# Allegro board ADUINO_UNO.brd
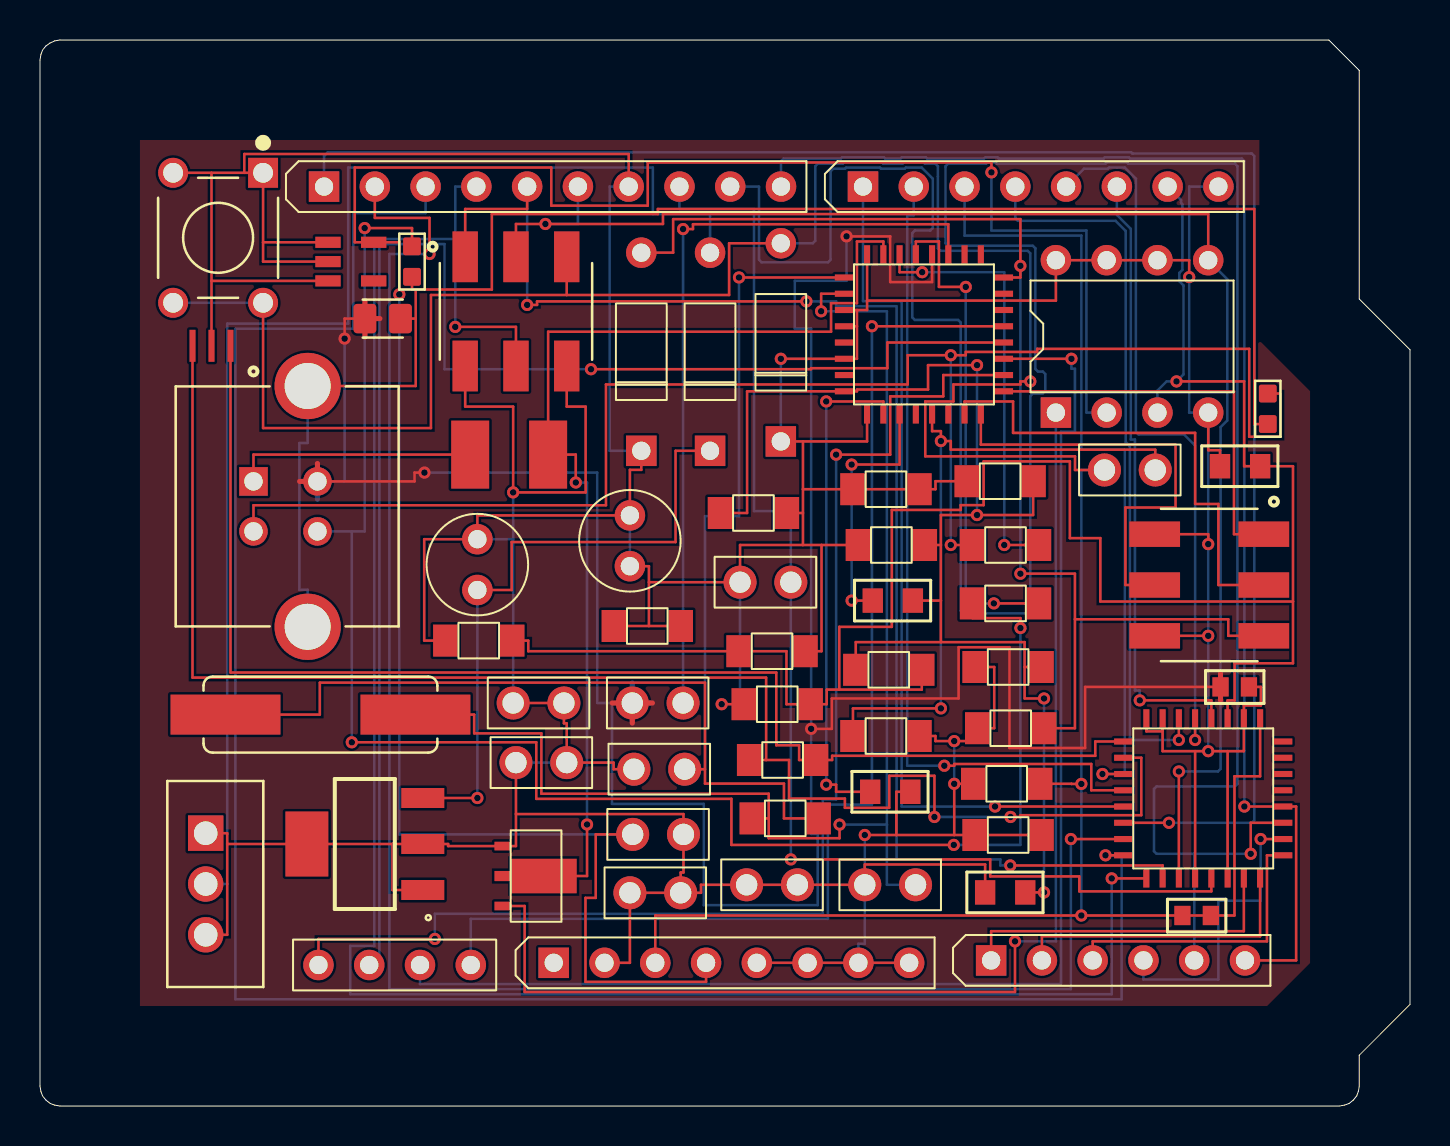
[diagram p0: board, top side]
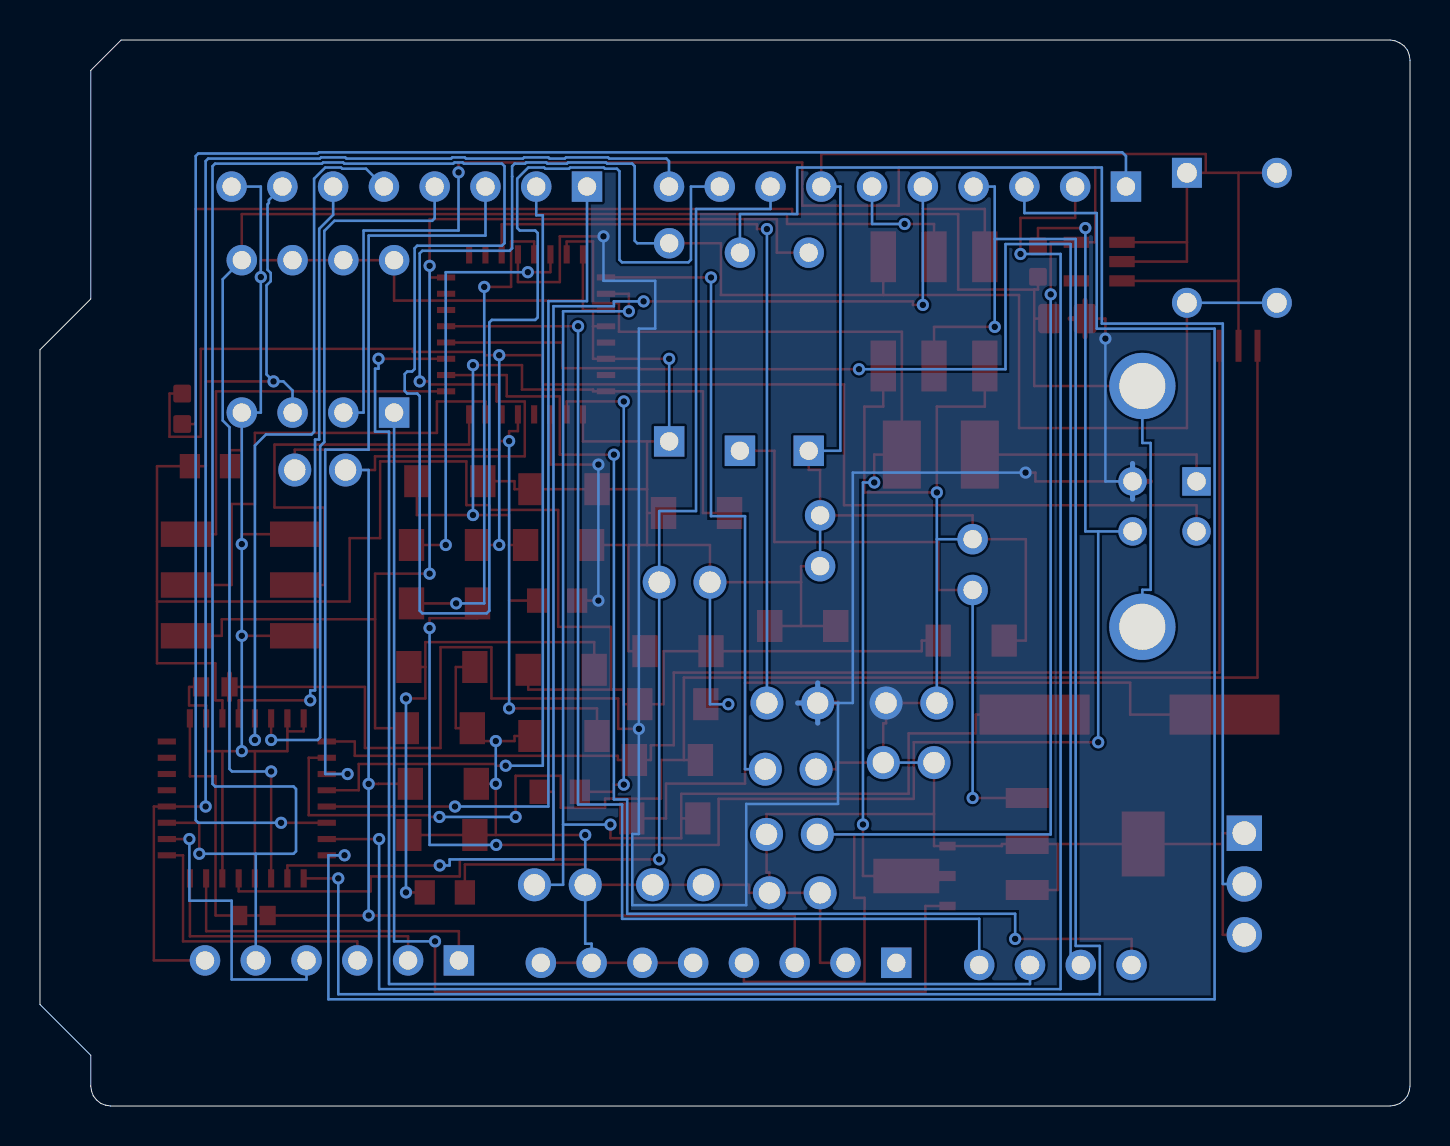
[diagram p1: board, bottom side, seen from below]

Outline 68.53 x 53.3 mm; copper layers: TOP, BOTTOM. Coordinates in mm from the lower left corner of the outline.
Outline path: 0,52.28 0,0.99 0.04,0.74 0.13,0.51 0.3,0.3 0.51,0.13 0.74,0.04 0.99,0 65,0 65.25,0.04 65.49,0.13 65.7,0.3 65.87,0.51 65.95,0.74 66,0.99 66,2.54 68.53,5.08 68.53,37.81 66,40.35 66,51.78 64.47,53.3 0.99,53.3 0.74,53.26 0.51,53.15 0.3,53 0.13,52.79 0.04,52.56 0,52.28

## Design rules (mm)
constraint set DEFAULT: min track width 0.127

## Placement (name value [footprint] x y rotation side)
C1  100n  [CAPCK05]  23.81 17.17 270 top
C2  100n  [CAPCK05]  23.67 20.15 270 top
C3  1u  [CAPCK05]  29.65 13.58 270 top
C4  100n  [CAPCK05]  35.02 26.19 270 top
C5  100n  [CAPCK05]  55.79 31.8 90 top
C6  100n  [CAPCK05]  35.35 11.06 270 top
C7  100n  [CAPCK05]  29.51 10.66 270 top
C8  1u  [CAPCK05]  32.17 20.15 90 top
C9  22p  [CAPCK05]  29.71 16.84 270 top
C11  22p  [CAPCK05]  41.26 11.06 270 top
CD120  DIODE  [DO41]  37.06 33.23 0 top
D1  M7  [DO41]  33.52 32.76 0 top
D3  CD1206-S01575  [DO41]  30.08 32.76 0 top
F1  MF-MSMF050-2 50mA  [FUSM1812X02]  23.47 32.57 0 top
GROUND  SW PUSHBUTTON  [SMC0603]  59.05 20.95 0 top
IC1  ATmega16U2-PU  [MY_ATMEGA328]  58.19 15.38 270 top
IC2  ATmega8 - TQFP32  [MY_ATMEGA328]  44.22 38.58 0 top
ICSP1  3X2 M  [MY_6PINHEADER]  58.49 26.05 270 top
J1  8*1F-88.5  [SIP8]  25.7 7.16 90 top
J4  3*2 M  [MY_6PINHEADER]  23.81 39.73 0 top
J5  10*1F-H8.5  [SIP10]  14.21 45.97 90 top
J7  6X1F-H8.5  [SIP6]  47.58 7.28 90 top
J8  8X1F-H8.5  [SIP8]  41.17 45.97 90 top
JP2  2*2 M- NM  [JUMPER4]  13.93 7.05 0 top
L  YELLOW  [SML0805]  59.03 31.99 0 top
L1  BLM21  [BEADC2012X87N]  17.14 39.37 0 top
ON  GREEN  [SML0805]  47.28 10.68 0 top
PC1  47u  [CAP196]  21.88 25.8 0 top
PC2  47u  [CAP196]  29.51 26.99 0 top
R1  1M  [SMDRES]  37.28 14.38 0 top
R2  1M  [SMDRES]  37.15 17.3 0 top
RESET-FM  SW PUSHBUTTON  [SMC0603]  57.15 9.53 0 top
RN1A  10k  [SMDRES]  36.88 20.09 0 top
RN1B  10k  [SMDRES]  36.62 22.74 0 top
RN1C  10k  [SMDRES]  48.56 18.89 0 top
RN1D  10k  [SMDRES]  48.36 16.11 0 top
RN2A  1k  [SMDRES]  21.95 23.27 0 top
RN2B  1k  [SMDRES]  30.38 24 0 top
RN2C  1k  [SMDRES]  35.69 29.65 0 top
RN2D  1k  [SMDRES]  42.32 18.5 0 top
RN3A  22  [SMDRES]  48.3 28.05 0 top
RN3B  RN3C  [SMDRES]  48.43 21.95 0 top
RN3D  22  [SMDRES]  48.3 25.13 0 top
RN4A  1k  [SMDRES]  42.46 21.81 0 top
RN4B  1k  [SMDRES]  42.32 30.84 0 top
RN4C  1k  [SMDRES]  42.59 28.05 0 top
RN4D  1k  [SMDRES]  48.03 31.24 0 top
RX  YELLOW  [SML0805]  41.53 15.71 0 top
SW1  SW PUSHBUTTON-SPST-2  [SW4PIN]  8.91 43.41 270 top
T1  FDN340P  [SOT89]  23.14 10 0 top
TX  YELLOW  [SML0805]  41.66 25.27 0 top
U1  NCP1117ST50T3G  [MY_NCP]  17.25 13.1 180 top
U2  LP2985-33DRVR  [MY_2985]  15.55 42.22 0 top
U7  LM358  [DIP8_3]  50.82 34.67 90 top
UNK22R  22R  [SMDRES]  48.43 13.55 0 top
X1  POWERSUPPLY_Y_DC21MMX  [MY_POWER2]  8.29 13.64 270 top
X2  USB-B_TH  [USB_B]  10.68 31.23 90 top
Y1  16MHz  [MY_XTAL]  14.03 19.57 0 top
Y2  CSTCE16M0V53-R0  [MY_XTALC]  8.58 38.01 0 top
Z1  CG0603MLC-05E  [R0603]  18.61 42.22 0 top
Z2  CG0603MLC-05E  [R0603]  61.42 34.86 0 top

## Library data of the parts
C1-C9 C11 = CAP NP: Tolerance: ***; User Part Number: ***
CD120 = DIODE_0
D1 D3 = DIODE
F1 = FUSE
GROUND RESET-FM = SW PUSHBUTTON
IC1 = ATMega8-TQFP32_1
IC2 = ATMega8-TQFP32_0
ICSP1 J4 = CON6A
J1 J8 = CON8: User Part Number: ***
J5 = CON10: User Part Number: ***
J7 = CON6_1: User Part Number: ***
JP2 = CON4A: User Part Number: ***
L ON RX TX = LED
L1 = BEAD
PC1 PC2 = CAP POL: Tolerance: ***; User Part Number: ***
R1 R2 RN1A RN1B RN1C RN1D RN2A RN2B RN2C RN2D RN3A RN3B RN3D RN4A RN4B RN4C RN4D UNK22R = R2: Tolerance: ***; User Part Number: ***
SW1 = SW PUSHBUTTON-SPST-2
T1 = EMOS-PD
U1 = BA17805FP/TO_3
U2 = LP2957/TO_0
U7 = LM358: Tolerance: ***; User Part Number: ***
X1 = BA17805FP/TO_8
X2 = CON6_5
Y1 = ZTA
Y2 = CSTCE8M00G52-R0
Z1 Z2 = VARISTOR

## Footprints (pads in the part's own frame, mm; a bottom-side part is the same pattern mirrored in y, then rotated)
BEADC2012X87N
  custom 1.14x1.47 smd: 1(-0.89,0) 2(0.89,0)
CAP196
  round 1.524 hole 0.914: 1(0,0) 2(0,2.54)
CAPCK05
  round 1.651 hole 1.067: 1(0,0) 2(0,2.54)
DIP8_3
  rect 1.524x1.524 hole 0.914: 1(0,0)
  round 1.524 hole 0.914: 2(0,-2.54) 3(0,-5.08) 4(0,-7.62) 5(7.62,-7.62) 6(7.62,-5.08) 7(7.62,-2.54) 8(7.62,0)
DO41
  rect 1.524x1.524 hole 0.914: 1(0,0)
  round 1.524 hole 0.914: 2(0,9.906)
FUSM1812X02
  rect 1.9x3.4 smd: 1(-1.95,0) 2(1.95,0)
JUMPER4
  round 1.524 hole 0.914: 1(0,0) 2(2.54,0) 3(5.08,0) 4(7.62,0)
MY_6PINHEADER
  rect 1.27x2.54 smd: 1(-2.54,2.73) 2(-2.54,-2.73) 3(0,2.73) 4(0,-2.73) 5(2.54,2.73) 6(2.54,-2.73)
MY_2985
  rect 1.27x0.559 smd: 1(-1.143,0.965) 2(-1.143,0) 3(-1.143,-0.965) 4(1.143,-0.965) 5(1.143,0.965)
MY_ATMEGA328
  rect 0.914x0.305 smd: 1(-4,2.846) 2(-4,2.032) 3(-4,1.219) 4(-4,0.406) 5(-4,-0.407) 6(-4,-1.22) 7(-4,-2.032) 8(-4,-2.845) 17(4,-2.846) 18(4,-2.032) 19(4,-1.219) 20(4,-0.406) 21(4,0.407) 22(4,1.22) 23(4,2.032) 24(4,2.845)
  rect 0.305x0.914 smd: 9(-2.846,-4) 10(-2.032,-4) 11(-1.219,-4) 12(-0.406,-4) 13(0.407,-4) 14(1.22,-4) 15(2.032,-4) 16(2.845,-4) 25(2.846,4) 26(2.032,4) 27(1.219,4) 28(0.406,4) 29(-0.407,4) 30(-1.22,4) 31(-2.032,4) 32(-2.845,4)
MY_NCP
  rect 2.15x1 smd: 1(-1.9,2.3) 2(-1.9,0) 3(-1.9,-2.3)
  rect 2.15x3.25 smd: 4(3.9,0)
MY_POWER2
  rect 1.77x1.77 hole 1.18: 1(0,0)
  round 1.77 hole 1.18: 2(2.54,0) 3(5.08,0)
MY_XTAL
  rect 5.5x2 smd: 1(-4.75,0) 2(4.75,0)
MY_XTALC
  rect 0.3x1.6 smd: 1(-0.95,0) 2(0,0) 3(0.95,0)
R0603
  custom 0.889x0.889 smd: 1(0,0.762) 2(0,-0.762)
SIP6
  rect 1.524x1.524 hole 0.914: 1(0,0)
  round 1.524 hole 0.914: 2(0,-2.54) 3(0,-5.08) 4(0,-7.62) 5(0,-10.16) 6(0,-12.7)
SIP8
  rect 1.524x1.524 hole 0.914: 1(0,0)
  round 1.524 hole 0.914: 2(0,-2.54) 3(0,-5.08) 4(0,-7.62) 5(0,-10.16) 6(0,-12.7) 7(0,-15.24) 8(0,-17.78)
SIP10
  rect 1.524x1.524 hole 0.914: 1(0,0)
  round 1.524 hole 0.914: 2(0,-2.54) 3(0,-5.08) 4(0,-7.62) 5(0,-10.16) 6(0,-12.7) 7(0,-15.24) 8(0,-17.78) 9(0,-20.32) 10(0,-22.86)
SMC0603
  rect 0.813x0.965 smd: 1(0,0) 2(1.422,0)
SMDRES
  rect 1.27x1.6 smd: 1(-1.651,0) 2(1.651,0)
SML0805
  rect 1.016x1.219 smd: 1(0,0) 2(2.007,0)
SOT89
  rect 0.813x0.432 smd: 1(0,0) 2(0,2.997)
  custom 4.115x1.727 smd: 3(1.651,1.499)
SW4PIN
  rect 1.498x1.498 hole 0.99: 1(-3.25,2.25)
  round 1.498 hole 0.99: 2(-3.25,-2.25) 3(3.25,2.25) 4(3.25,-2.25)
USB_B
  rect 1.428x1.428 hole 0.92: 1(0,0)
  round 1.428 hole 0.92: 2(-2.5,0) 3(-2.5,-3.2) 4(0,-3.2)
  round 3.316 hole 2.3: SH1(-7.27,-2.71) SH2(4.77,-2.71)

## Nets
+3V3: C3.1 J1.4 U2.5(OUT) U7.2
+5V: C1.1 C1.2 C2.1 C2.2 C3.2 C4.1 C6.1 C6.2 C7.1 C7.2 C9.1 C11.1 CD120.1(K) D3.1(K) GROUND.2 IC1.2 IC1.7 IC1.8 IC1.20 IC1.22 IC2.3 IC2.4 IC2.6 IC2.9 IC2.32 ICSP1.2 ICSP1.6 J1.2 J1.5 J1.6 J1.7 J1.8 J4.2 J4.6 J5.7 J8.8 L.1(CATHODE) ON.1(CATHODE) PC1.2 PC2.1 PC2.2 RN1A.1 RN1B.2 RN1C.1 RN1D.1 RN2A.1 RN2B.1 RN2B.2 RN2C.2 RN2D.2 RN3B.1 RN4B.1 RN4B.2 RN4C.1 RN4D.1 RX.2 SW1.1 SW1.2 T1.2(S) U1.1 U1.2 U1.4(OUT) U2.1 U2.2 U2.3 U7.4 U7.6 U7.7(OUT) U7.8 UNK22R.1 UNK22R.2 X1.1 X1.3 Y2.2
1: IC1.3 J8.7 L.2 RN1A.2 RN1B.1 RN2A.2 RN4A.2 U7.3
5: IC2.8 ON.2 RN2C.1 RN3B.2 RN4A.1 RN4C.2 RN4D.2 TX.2
AD0: IC1.23 J7.1
AD1: IC1.24 J7.2
AD2: IC1.25 J7.3
AD3: IC1.26 J7.4
AD4/SDA: IC1.27 J5.9 J7.5(P$1)
AD5/SCI: IC1.28 J5.10 J7.6
AREF: C4.2 IC1.21 J5.8
DTR: C5.1 IC2.13 RN2D.1
IO2: IC1.4 J8.6
IO3: IC1.5 J8.5
IO4: IC1.6 J8.4
IO5: IC1.11 J8.3
IO6: IC1.12 J8.2
IO7: IC1.13 J8.1
IO8: IC1.14 J5.1
IO9: IC1.15 J5.2
MISO: IC1.18 J4.1 J5.5
MISO2: IC2.17 ICSP1.1
MOSI: IC1.17 J4.4 J5.4
MOSI2: IC2.16 ICSP1.4
PB4: IC2.18 JP2.1
PB5: IC2.19 JP2.3
PB6: IC2.20 JP2.2
PB7: IC2.21 JP2.4
PWRIN: D1.2 X1.2
RD+: IC2.29 RN3D.2
RD-: IC2.30 RN3A.2
RESET: C5.2 CD120.2 IC1.1 J1.3 J4.5 RESET-FM.1 RESET-FM.2 RN1D.2 SW1.3 SW1.4
RESET2: D3.2 IC2.24 ICSP1.5 RN1C.2
RXLED: IC2.10 RX.1(CATHODE)
SCK: IC1.19 J4.3 J5.6 U7.5
SCK2: IC2.15 ICSP1.3
SS: IC1.16 J5.3
TP_VUCAP: C8.1 IC2.27
TXLED: IC2.11 TX.1(CATHODE)
UGND: C8.2 GROUND.1 IC2.28 L1.1 X2.4
USBVCC: F1.2 IC2.31 T1.3
USHIELD: L1.2 X2.SH1 X2.SH2(6) Z1.2 Z2.2
XT1: C9.2 IC2.1 R1.2 Y1.1
XT2: C11.2 IC2.2(XTAL2(PC0)) R1.1 Y1.2
XUSB: F1.1 X2.1
N01472: T1.1 U7.1
N03886: RN3A.1 X2.2 Z2.1
N03915: RN3D.1 X2.3 Z1.1
N09861: IC1.10(XTAL2) R2.1 Y2.1
N20628: D1.1(K) PC1.1 U1.3
N61244: IC1.9 R2.2 Y2.3

Pads without a net: IC1 29 30 31 32; IC2 5 7 12 14 22 23 25 26; J1 1; U2 4

## Via types
v1: diameter 0.61, hole 0.33, TOP to BOTTOM, 78 vias

## Routing (per net, layer and track width the routed paths; a pad name or vN(x,y) marks a point on that pad's centre or on a via; arc(x,y) is an arc through that point)
+3V3: length 118.2
  TOP w0.127: C3.1 27.8,13.58 27.8,10.41 27.29,10.41 27.29,6.21 33.32,6.21 J1.4 ; v1(47.6,46.68) 47.6,47.18 30.4,47.18 30.4,45.02 25.58,45.02 25.58,46.92 15.75,46.92 15.75,43.19 U2.5 17.98,43.19 v1(17.98,40.58)
  BOTTOM w0.127: v1(17.98,40.58) 17.98,13.58 C3.1 ; v1(47.6,46.68) 47.6,43.77 52.35,43.77 52.35,34.67 U7.2
+5V: length 395.6
  TOP w0.127: 45.73,13.55 v1(45.73,16.11) RN1D.1 ; 45.73,13.55 42.84,13.55 ; 45.73,13.55 UNK22R.1 UNK22R.2 ; RN2D.2 44.8,18.5 44.8,18.25 v1(45.73,18.25) 46.91,18.25 RN1C.1 47.73,18.89 47.73,21.95 RN3B.1 ; 11.16,43.19 SW1.1 10.22,46.66 ; 11.16,43.19 11.16,42.22 U2.2 ; 11.16,43.19 U2.1 ; RN2A.1 19.22,23.27 19.22,28.34 PC1.2 21.88,29.53 PC2.2 29.51,31.81 30.08,31.81 D3.1 ; 40.87,38.99 40.87,39.8 ; 40.87,38.99 IC2.4 ; 40.87,38.99 40.87,37.36 IC2.6 v1(37.06,37.36) ; 40.87,39.8 IC2.3 ; 40.87,39.8 41.38,39.8 41.38,40.27 ; v1(57.49,41.45) 57.49,42.29 U7.6 U7.7 U7.8 50.82,40.27 41.38,40.27 ; 56.16,18.73 56.16,17.74 57.78,17.74 ; 56.16,18.73 IC1.7 ; 56.16,18.73 55.34,18.73 IC1.8 ; RN1B.2 39.1,22.74 39.1,28.05 ; L.1 59.03,32.79 58.44,32.79 U7.4 ; 9.37,13.1 9.37,8.56 X1.3 ; 9.37,13.1 9.37,13.64 X1.1 ; 9.37,13.1 U1.4 17.63,13.1 ; v1(41.26,13.55) 42.84,13.55 ; 42.84,13.55 42.84,15.71 RX.2 ; IC2.9 41.37,33.23 38.17,33.23 ; U1.1 17.63,10.8 17.63,13.1 ; RN1A.1 v1(34.1,20.09) ; 10.22,46.66 8.58,46.66 ; 10.22,46.66 10.22,47.6 29.45,47.6 J5.7 ; 8.58,46.66 8.58,41.25 ; 8.58,46.66 SW1.2 ; 30.46,26.19 C4.1 35.02,28.05 38.17,28.05 ; 30.46,26.19 30.46,26.99 PC2.1 ; 30.46,26.19 30.46,24 ; 57.78,17.74 v1(58.44,17.74) 59.41,17.74 ; 57.78,17.74 IC1.20 ; GROUND.2 61.07,20.95 61.07,20.03 60.22,20.03 IC1.2 60.22,17.74 59.41,17.74 ; C7.2 C7.1 29.51,7.16 J1.2 ; C7.2 33.07,10.66 33.07,11.06 C6.1 C6.2 C11.1 41.26,12.08 47.28,12.08 ON.1 ; C7.2 32.05,11.68 32.19,11.68 C3.2 32.19,14.6 23.81,14.6 ; 8.58,41.25 Y2.2 ; 8.58,41.25 U2.3 ; 41.38,40.27 IC2.32 ; J4.6 26.35,34.97 27.3,34.97 27.3,30.68 v1(23.67,30.68) 23.67,34.97 21.27,34.97 J4.2 ; RN2C.2 38.17,29.65 ; 38.17,29.65 38.17,28.05 ; 38.17,29.65 38.17,30.84 ; J1.5 J1.6 J1.7 J1.8 ; 38.17,30.84 RN4B.1 RN4B.2 44.8,30.84 44.8,31.24 RN4D.1 ; 38.17,30.84 38.17,33.23 ; 39.1,28.05 38.17,28.05 ; 39.1,28.05 RN4C.1 ; IC1.22 59.41,17.74 ; 17.63,13.1 U1.2 20.42,13.1 20.42,13 T1.2 23.81,13 23.81,14.6 ; 38.17,33.23 CD120.1 ; ICSP1.2 58.44,28.59 v1(58.44,28.09) ; 23.81,14.6 C1.1 ; ICSP1.6 v1(58.44,23.51) ; 30.46,24 RN2B.2 ; 30.46,24 RN2B.1 ; C2.1 C2.2 26.21,19.13 26.35,19.13 C1.2 28.69,17.17 28.69,16.84 C9.1
  BOTTOM w0.127: v1(58.44,17.74) v1(58.44,23.51) v1(58.44,28.09) U7.4 57.49,34.67 v1(57.49,41.45) 57.49,45.97 J8.8 ; C1.1 C1.2 ; v1(37.06,37.36) CD120.1 ; J5.7 28.5,45.97 28.5,32.76 D3.1 ; PC2.1 PC2.2 ; 23.67,28.34 v1(23.67,30.68) ; 23.67,28.34 PC1.2 ; 23.67,28.34 C2.1 ; J1.7 40.94,8.11 41.26,8.11 C11.1 v1(41.26,13.55) ; C4.1 35.02,20.09 v1(34.1,20.09) ; v1(45.73,18.25) v1(45.73,16.11)
1: length 105.1
  TOP w0.127: IC1.3 59.41,20.28 59.76,20.28 59.76,22.14 62.68,22.14 62.68,25.22 ; 39.98,20.82 39.98,23.96 42.61,23.96 42.61,29.8 46.06,29.8 46.06,30.04 47.2,30.04 47.2,32.23 51.52,32.23 51.52,28.39 53.04,28.39 53.04,25.22 62.68,25.22 ; 39.98,20.82 39.36,20.82 39.36,20.09 RN1A.2 37.34,20.09 37.34,22.74 RN1B.1 24.43,22.74 24.43,23.27 RN2A.2 ; 39.98,20.82 44.11,20.82 RN4A.2 ; 62.68,25.22 62.68,31.99 L.2 60.24,31.99 60.24,36.23 v1(56.85,36.23)
  BOTTOM w0.127: U7.3 55.9,35.77 56.36,36.23 v1(56.85,36.23) 57.2,36.58 57.2,41.03 56.99,41.24 56.99,41.65 57.15,41.81 57.15,45.09 57.08,45.15 57.08,45.3 J8.7
5: length 67.7
  TOP w0.127: 45.07,28.05 45.07,29.55 v1(46.87,29.55) 49.68,29.55 49.68,31.24 ; 45.07,28.05 45.07,25.27 ; 45.07,28.05 44.24,28.05 ; TX.2 45.07,25.27 ; 45.07,25.27 45.07,23.19 ; 45.07,23.19 40.81,23.19 RN4A.1 ; 45.07,23.19 49.26,23.19 49.26,21.95 ; RN3B.2 49.26,21.95 ; 49.26,21.95 49.26,20.38 v1(50.23,20.38) ; ON.2 v1(50.23,10.68) ; v1(46.87,37.04) 44.42,37.04 44.42,35.82 40.87,35.82 40.87,35.73 IC2.8 35.37,35.73 35.37,29.65 34.04,29.65
  BOTTOM w0.127: v1(46.87,37.04) v1(46.87,29.55) ; v1(50.23,20.38) v1(50.23,10.68)
AD0: length 16.7
  TOP w0.127: IC1.23 60.22,8.74 47.58,8.74 J7.1
AD1: length 15
  TOP w0.127: J7.2 50.12,8.49 61.03,8.49 IC1.24
AD2: length 14.8
  TOP w0.127: J7.3 52.66,8.23 61.38,8.23 61.38,12.53 IC1.25
AD3: length 15
  TOP w0.127: IC1.26 v1(61.06,13.35)
  BOTTOM w0.127: J7.4 55.2,6.33 58.95,6.33 58.95,10.26 61.06,10.26 v1(61.06,13.35)
AD4/SDA: length 141
  TOP w0.127: v1(60.56,12.61) 60.56,14.16 62.19,14.16
  BOTTOM w0.127: 57.74,12.61 55.85,12.61 55.73,12.74 55.73,15.85 55.85,15.98 59.78,15.98 59.9,16.1 59.9,46.99 59.78,47.12 54.43,47.12 54.37,47.18 53.37,47.18 53.31,47.12 47.86,47.12 47.8,47.18 47.39,47.18 47.33,47.12 45.42,47.12 45.3,46.99 45.3,43.14 45.42,43.01 49.67,43.01 49.79,42.89 49.79,36.85 49.92,36.72 50.16,36.72 50.29,36.6 50.29,35.75 50.16,35.62 49.67,35.62 49.54,35.5 49.54,24.76 49.41,24.63 46.18,24.63 46.06,24.76 46.06,39.18 45.93,39.3 43.76,39.3 43.64,39.43 43.64,43.65 43.76,43.77 44.54,43.77 44.66,43.9 44.66,46.36 44.1,46.92 43.32,46.92 43.26,46.86 42.07,46.86 42.01,46.92 40.33,46.92 40.27,46.86 39.67,46.86 39.55,46.74 39.55,42.31 39.42,42.18 36.1,42.18 35.97,42.31 35.97,45.97 J5.9 ; 57.74,12.61 J7.5 ; 57.74,12.61 v1(60.56,12.61)
AD5/SCI: length 69.9
  TOP w0.127: J7.6 62.84,7.28 62.84,14.97 IC1.28 v1(60.25,14.97)
  BOTTOM w0.127: J5.10 37.07,47.24 37.2,47.37 40.06,47.37 40.12,47.43 42.22,47.43 42.28,47.37 43.05,47.37 43.1,47.43 44.32,47.43 44.37,47.37 47.23,47.37 47.29,47.43 47.91,47.43 47.97,47.37 53.21,47.37 53.26,47.43 54.48,47.43 54.53,47.37 60.12,47.37 60.25,47.24 v1(60.25,14.97)
AREF: length 62.5
  TOP w0.127: v1(37.56,12.33) 47.53,12.33 47.53,11.48 51.99,11.48 51.99,10.73 58.6,10.73 IC1.21
  BOTTOM w0.127: J5.8 31.99,44.85 35.72,44.85 35.72,29.75 37.56,29.75 C4.2 v1(37.56,12.33)
DTR: length 33.1
  TOP w0.127: v1(45.07,19.88) 40.67,19.88 RN2D.1 ; C5.1 55.79,32.82 45.56,32.82 45.56,33.25 v1(45.07,33.25) 45.07,33.74 44.63,33.74 44.63,34.58
  BOTTOM w0.127: v1(45.07,19.88) v1(45.07,33.25)
IO2: length 30.9
  TOP w0.127: IC1.4 58.6,20.28 v1(55.02,20.28)
  BOTTOM w0.127: J8.6 53.87,44.55 54.57,43.86 54.57,33.32 54.77,33.32 54.77,20.78 55.02,20.78 v1(55.02,20.28)
IO3: length 35.8
  TOP w0.127: IC1.5 v1(57.78,18.3)
  BOTTOM w0.127: J8.5 52.22,46.86 53.42,46.86 53.48,46.92 54.26,46.92 54.82,46.36 54.82,33.71 54.95,33.58 57.23,33.58 57.78,33.02 v1(57.78,18.3)
IO4: length 36.4
  TOP w0.127: IC1.6 v1(56.97,18.3)
  BOTTOM w0.127: v1(56.97,18.3) 54.65,18.3 54.52,18.43 54.52,32.99 54.31,33.2 54.31,43.75 53.81,44.26 48.92,44.26 48.79,44.39 J8.4
IO5: length 39.5
  TOP w0.127: IC1.11 v1(53.15,16.6)
  BOTTOM w0.127: v1(53.15,16.6) 54.27,16.6 54.27,32.82 52.09,32.82 52.09,43.52 46.25,43.52 J8.3
IO6: length 41.5
  TOP w0.127: IC1.12 52.59,15.79 52.59,17.1 45.73,17.1 45.73,17.01 v1(45.24,17.01)
  BOTTOM w0.127: J8.2 43.71,44.54 43.38,44.54 43.38,17.01 v1(45.24,17.01)
IO7: length 44
  TOP w0.127: IC1.13 v1(47.78,14.97)
  BOTTOM w0.127: J8.1 41.17,40.24 43.1,40.24 43.1,14.97 v1(47.78,14.97)
IO8: length 88
  TOP w0.127: IC1.14 v1(56.48,14.16)
  BOTTOM w0.127: v1(56.48,14.16) 60.62,14.16 60.74,14.29 60.74,47.5 60.62,47.62 54.64,47.62 54.58,47.68 14.4,47.68 14.21,47.5 J5.1
IO9: length 89.1
  TOP w0.127: v1(19.49,42.6) 19.49,44.4 16.75,44.4 J5.2 ; IC1.15 v1(51.57,13.35)
  BOTTOM w0.127: v1(19.49,42.6) 17.48,42.6 17.48,5.84 51.57,5.84 v1(51.57,13.35)
MISO: length 73.3
  TOP w0.127: IC1.18 56.16,12.03 v1(48.54,12.03) ; J5.5 24.37,44.85 21.27,44.85 J4.1 ; v1(24.37,40.05) 24.87,40.05 24.87,40.23 v1(38.34,40.23)
  BOTTOM w0.127: v1(24.37,40.05) J5.5 ; v1(38.34,40.23) 39.83,40.23 39.83,39.99 42.85,39.99 42.85,12.33 48.04,12.33 48.04,12.03 v1(48.54,12.03)
MISO2: length 20.1
  TOP w0.127: IC2.17 59.73,35.73 59.73,28.59 ICSP1.1
MOSI: length 101.7
  TOP w0.127: IC1.17 v1(53.61,11.38) ; v1(20.77,38.96) 23.81,38.96 J4.4
  BOTTOM w0.127: J5.4 20.77,45.97 20.77,43.35 ; v1(53.61,11.38) 53.61,5.59 15.52,5.59 15.52,8 16.72,8 16.72,43.35 20.77,43.35 ; 20.77,43.35 v1(20.77,38.96)
MOSI2: length 22.2
  TOP w0.127: ICSP1.4 54.3,26.05 54.3,29.92 56.81,29.92 56.81,33.07 47.06,33.07 IC2.16
PB4: length 63.8
  TOP w0.127: v1(39.83,32.57) 42.53,32.57 42.53,35.48 45.19,35.48 45.19,36.55 IC2.18 ; v1(19.75,8.35) 13.93,8.35 JP2.1
  BOTTOM w0.127: v1(19.75,8.35) 19.75,9.61 39.16,9.61 39.16,15.33 39.83,15.33 v1(39.83,32.57)
PB5: length 68.5
  TOP w0.127: IC2.19 v1(51.6,37.36)
  BOTTOM w0.127: JP2.3 19.01,6.1 51.07,6.1 51.07,33.72 51.77,33.72 51.77,36.87 51.6,36.87 v1(51.6,37.36)
PB6: length 75.4
  TOP w0.127: v1(27.56,36.84) 38.57,36.84 38.57,36.89 42.39,36.89 42.39,38.17 IC2.20
  BOTTOM w0.127: v1(27.56,36.84) 20.24,36.84 20.24,43.1 16.98,43.1 16.98,7.05 JP2.2
PB7: length 58.6
  TOP w0.127: 48.22,38.99 v1(41.62,38.99)
  BOTTOM w0.127: JP2.4 21.55,9.36 39.41,9.36 39.41,15.07 41.62,15.07 v1(41.62,38.99)
PWRIN: length 65.3
  BOTTOM w0.127: D1.2 33.52,44.6 30.66,44.6 30.66,46.92 15.42,46.92 15.42,39.12 9.37,39.12 9.37,11.1 X1.2
RD+: length 24.9
  TOP w0.127: IC2.29 43.81,43.23 44.97,43.23 44.97,40.95 v1(46.31,40.95) ; RN3D.2 v1(47.72,25.13)
  BOTTOM w0.127: v1(46.31,40.95) 46.31,25.13 v1(47.72,25.13)
RD-: length 21.5
  TOP w0.127: RN3A.2 v1(48.24,28.05) ; v1(44.13,41.69) 43,41.69 IC2.30
  BOTTOM w0.127: v1(44.13,41.69) 48.24,41.69 v1(48.24,28.05)
RESET: length 161.5
  TOP w0.127: v1(52.09,16.1) 51.6,16.1 51.6,16.11 RN1D.2 ; CD120.2 34.47,43.14 34.47,40.55 26.35,40.55 ; IC1.1 61.04,16.49 59.75,16.49 59.75,9.53 RESET-FM.2 RESET-FM.1 v1(52.09,9.53) 30.78,9.53 J1.3 ; J4.5 26.35,40.55 ; 26.35,40.55 19.56,40.55 19.56,33.9 11.16,33.9 SW1.3 ; C5.2 51.78,31.8 51.78,32.48 44.28,32.48 44.28,35.23 45.69,35.23 45.69,36.08 49.04,36.08 49.04,36.23 v1(49.54,36.23)
  BOTTOM w0.127: v1(49.54,36.23) 49.54,42.63 49.41,42.76 45.04,42.76 44.92,42.89 44.92,46.47 44.92,46.99 44.79,47.12 44.27,47.12 44.21,47.18 43.21,47.18 43.15,47.12 42.18,47.12 42.12,47.18 40.22,47.18 40.16,47.12 38.91,47.12 38.78,46.99 38.78,43.26 38.66,43.14 CD120.2 ; C5.2 52.09,31.8 v1(52.09,16.1) v1(52.09,9.53) ; SW1.4 SW1.3
RESET2: length 62.1
  TOP w0.127: ICSP1.5 59.44,23.51 59.44,24.34 51.77,24.34 ; D3.2 31.67,42.67 31.67,44.34 49.04,44.34 v1(49.04,42.01) 49.04,41.42 IC2.24 ; 51.77,24.34 51.77,18.89 RN1C.2 ; 51.77,24.34 51.77,26.62 v1(49.04,26.62)
  BOTTOM w0.127: v1(49.04,26.62) v1(49.04,42.01)
RXLED: length 25.2
  TOP w0.127: v1(39.33,35.23) 42.19,35.23 IC2.10 ; RX.1 39.83,15.71 39.83,16.07 v1(39.33,16.07)
  BOTTOM w0.127: v1(39.33,35.23) v1(39.33,16.07)
SCK: length 76
  TOP w0.127: J4.3 23.81,44.1 v1(25.28,44.1) 31.16,44.1 31.16,44.6 58.44,44.6 U7.5 ; IC1.19 v1(56.97,16.73)
  BOTTOM w0.127: J5.6 26.91,44.1 v1(25.28,44.1) ; v1(56.97,16.73) 58.93,16.73 59.05,16.85 59.05,33.94 59.39,34.28 59.39,41.34 U7.5
SCK2: length 24.8
  TOP w0.127: ICSP1.3 58.95,26.05 58.95,30.1 57.78,30.1 57.78,33.66 48.68,33.66 48.68,35.23 46.25,35.23 IC2.15
SS: length 103.4
  TOP w0.127: IC1.16 v1(53.3,12.54)
  BOTTOM w0.127: J5.3 19.29,44.65 15.67,44.65 15.67,38.86 9.78,38.86 9.78,5.34 54.11,5.34 54.11,12.54 v1(53.3,12.54)
TP_VUCAP: length 38.7
  TOP w0.127: v1(32.17,43.85) 32.67,43.85 32.67,44.09 45.44,44.09 IC2.27
  BOTTOM w0.127: C8.1 v1(32.17,43.85)
TXLED: length 12.8
  TOP w0.127: TX.1 v1(40.6,25.27) ; IC2.11 43,32.07 v1(40.6,32.07)
  BOTTOM w0.127: v1(40.6,32.07) v1(40.6,25.27)
UGND: length 149.9
  TOP w0.127: X2.4 18.74,31.23 18.74,31.67 v1(19.23,31.67) ; v1(40.35,43.48) 42.53,43.48 42.53,41.2 44.63,41.2 IC2.28 ; v1(38.58,18.86) 39.61,18.86 39.61,20.38 45.95,20.38 45.95,22.94 48.5,22.94 48.5,17.9 52.28,17.9 52.28,20.95 GROUND.1 ; v1(15.24,38.37) 15.24,39.37 L1.1
  TOP w0.254: 13.88,32.12 X2.4 12.99,31.23 ; 59.05,20.29 GROUND.1 59.05,21.62 ; C8.2 30.63,20.15 ; C8.2 29.63,19.15 ; C8.2 28.63,20.15 ; 16.25,38.46 L1.1 ; L1.1 17,39.37 ; L1.1 16.25,40.28
  BOTTOM w0.127: 28.61,20.15 28.61,15.1 33.21,15.1 33.21,10.04 38.91,10.04 38.91,13.6 38.58,13.6 v1(38.58,18.86) 38.58,38.87 37.76,38.87 37.76,41.26 40.35,41.26 v1(40.35,43.48) ; 28.61,20.15 C8.2 ; 28.61,20.15 27.87,20.15 27.87,31.67 v1(19.23,31.67) ; v1(15.24,38.37) 15.24,31.23 X2.4
  BOTTOM w0.254: 13.88,32.12 X2.4 13.88,30.34 ; 29.63,19.15 C8.2 ; C8.2 29.63,21.15 ; C8.2 30.63,20.15
USBVCC: length 53.7
  TOP w0.127: T1.3 27.37,11.5 v1(27.37,14.08) ; v1(26.8,31.17) 26.8,32.57 F1.2 25.42,38.71 39.57,38.71 39.57,40.14 40.87,40.14 40.87,43.23 42.19,43.23 IC2.31
  BOTTOM w0.127: v1(27.37,14.08) 27.37,31.17 v1(26.8,31.17)
USHIELD: length 82.1
  TOP w0.127: Z1.2 18.61,40.82 18.8,40.82 ; 18.8,40.82 22.6,40.82 22.6,44.6 30.91,44.6 30.91,44.85 60.74,44.85 60.74,34.1 Z2.2 ; 18.8,40.82 18.8,39.37 ; 18.8,39.37 18.8,36 X2.SH2 ; 18.8,39.37 L1.2
  BOTTOM w0.127: X2.SH2 13.39,33.15 12.98,33.15 12.98,25.81 13.39,25.81 X2.SH1
XT1: length 71.6
  TOP w0.127: 33.27,16.84 33.27,21.17 14,21.17 14,19.57 Y1.1 ; 33.27,16.84 33.27,16.12 37.22,16.12 37.22,14.38 R1.2 ; 33.27,16.84 C9.2 ; IC2.1 v1(34.97,41.43)
  BOTTOM w0.127: v1(34.97,41.43) 34.97,29.49 33.27,29.49 33.27,16.84 C9.2
XT2: length 66.7
  TOP w0.127: R1.1 36.45,14.38 ; 36.45,14.38 36.45,13.39 40,13.39 v1(40,14.07) ; 36.45,14.38 36.45,15.61 25.08,15.61 25.08,18.63 21.72,18.63 21.72,19.57 Y1.2 ; v1(39.08,39.74) 39.08,40.61 IC2.2
  BOTTOM w0.127: 42.37,14.07 42.37,39.74 v1(39.08,39.74) ; 42.37,14.07 v1(40,14.07) ; 42.37,14.07 42.37,11.06 C11.2
XUSB: length 12.2
  TOP w0.127: F1.1 10.68,32.57 X2.1
N01472: length 61
  TOP w0.127: v1(48.77,8.23) 48.77,5.7 24.24,5.7 24.24,10 T1.1
  BOTTOM w0.127: v1(48.77,8.23) 50.82,8.23 U7.1
N03886: length 78.3
  TOP w0.127: X2.2 10.68,30.04 28.31,30.04 28.31,36.08 43.41,36.08 43.41,37.54 v1(45.56,37.54) 46.31,37.54 46.31,37.7 49.88,37.7 49.88,37.86 60.49,37.86 60.49,33.46 62.05,33.46 62.05,35.62 Z2.1 ; RN3A.1 v1(45.56,28.05)
  BOTTOM w0.127: v1(45.56,28.05) v1(45.56,37.54)
N03915: length 84.4
  TOP w0.127: v1(15.6,18.19) 24.83,18.19 24.83,15.36 34.59,15.36 34.59,13.05 v1(45.71,13.05) ; v1(16.24,43.9) 18.61,43.9 Z1.1 ; v1(49.05,23.9) 49.05,24.39 46.65,24.39 RN3D.1
  BOTTOM w0.127: 15.6,28.73 v1(15.6,18.19) ; 15.6,28.73 X2.3 ; 15.6,28.73 16.24,28.73 v1(16.24,43.9) ; v1(45.71,13.05) 49.05,13.05 v1(49.05,23.9)
N09861: length 78.9
  TOP w0.127: 36.32,17.3 37.47,17.3 37.47,15.37 40.26,15.37 40.26,14.91 42.48,14.91 42.48,16.51 44.74,16.51 v1(44.74,14.45) ; 36.32,17.3 35.5,17.3 ; 36.32,17.3 36.32,21.42 7.63,21.42 Y2.1 ; v1(48.55,14.45) 49.05,14.45 49.05,14.54 55.09,14.54 55.09,17.41 IC1.10
  BOTTOM w0.127: v1(48.55,14.45) v1(44.74,14.45)
N20628: length 31.7
  TOP w0.127: PC1.1 23.59,25.8 23.59,28.2 31.79,28.2 31.79,32.76 D1.1 ; U1.3 v1(21.88,15.4)
  BOTTOM w0.127: v1(21.88,15.4) PC1.1
N61244: length 66.3
  TOP w0.127: IC1.9 52.79,18.23 52.79,17.51 39.63,17.51 39.63,17.3 R2.2 37.98,17.3 37.98,18.04 36.83,18.04 36.83,21.67 9.53,21.67 Y2.3

## Copper pours and planes (outline as drawn; the poured copper is in the pictures)
UGND on TOP: 5,5 5,48.3 61,48.3 61,38.28 63.53,35.74 63.53,7.15 61.39,5 ; 64 cut-outs
UGND on BOTTOM: 61.39,5 5,5 5,48.3 61,48.3 61,38.28 63.53,35.74 63.53,7.15 ; 47 cut-outs
